# Altium PCB PCB_modulos_placa_swarm_robotics.PcbDoc
Units mil, origin at the board's own origin, x right, y up, seen from the top; angles counter-clockwise.
Board outline 2600 x 2100 mil, 2 copper layers (Top Layer, Bottom Layer); 9 components, 28 nets, 79 pads, 0 vias.
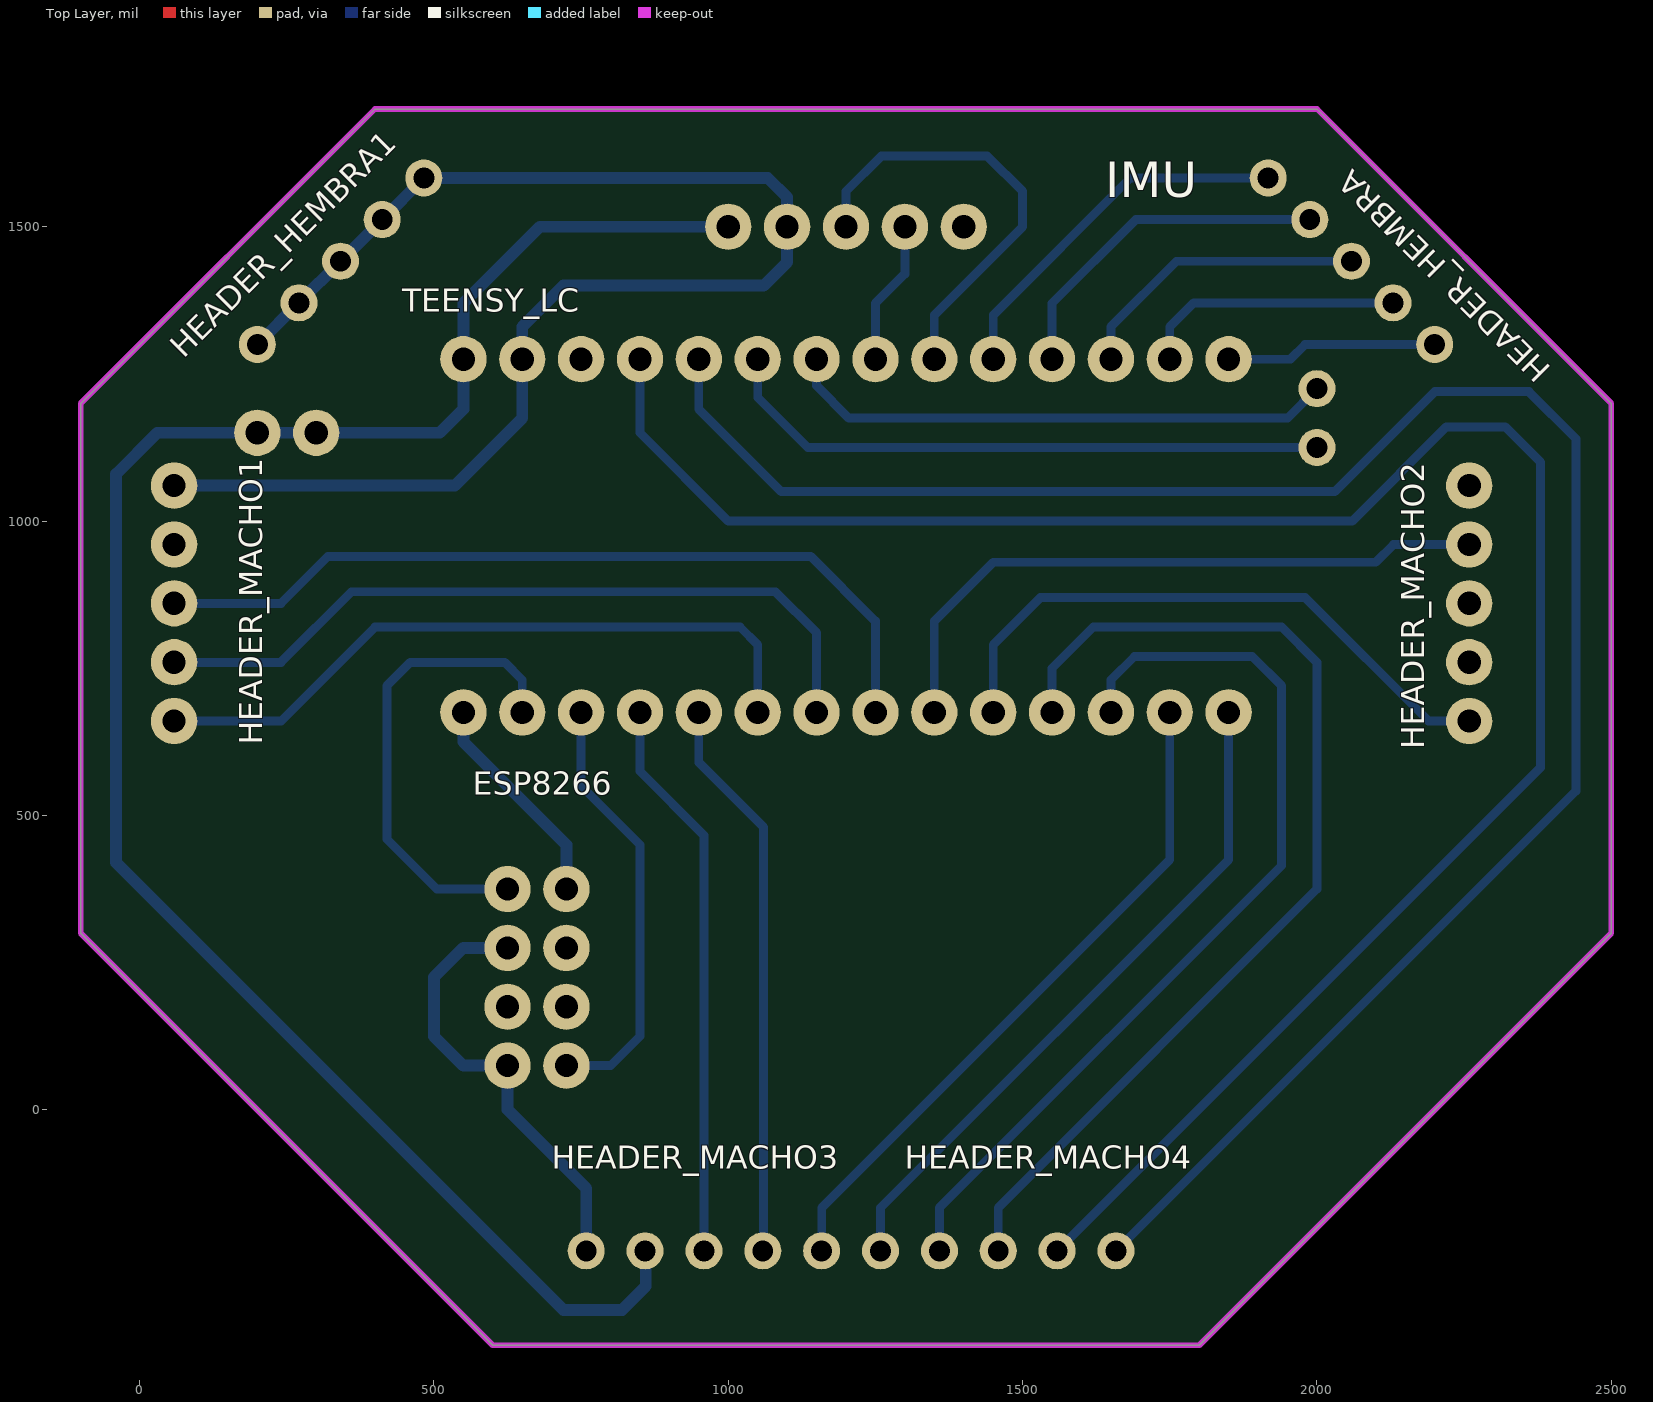
[diagram p0: Top Layer view]
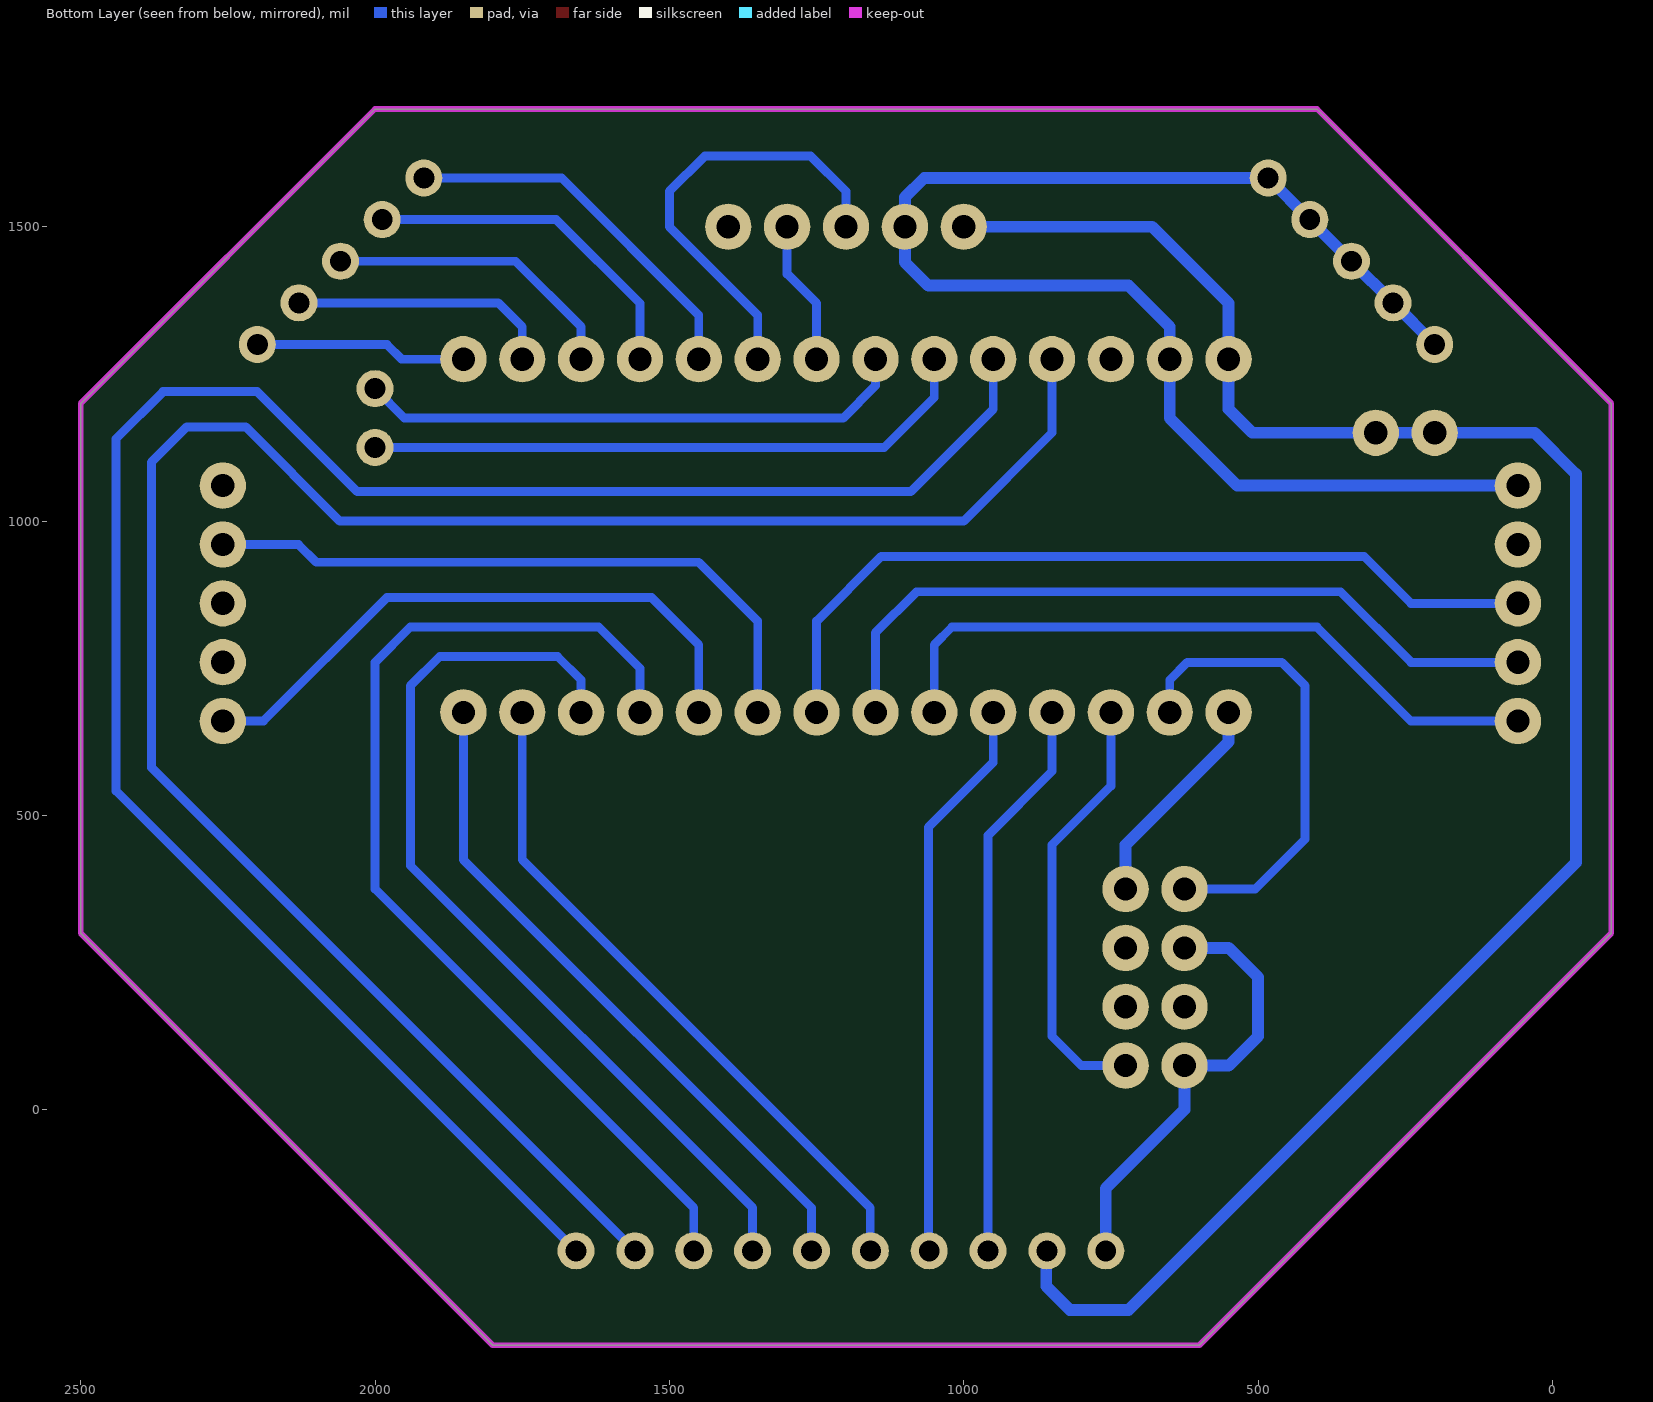
[diagram p1: Bottom Layer view, seen from below]

## Layer stack, top to bottom
Top Solder: solder mask 0.4, Solder Resist, Dk 3.5
Top Layer: signal copper 1.4
Dielectric 1: dielectric 12.6, FR-4, Dk 4.8
Bottom Layer: signal copper 1.4
Bottom Solder: solder mask 0.4, Solder Resist, Dk 3.5

## Board outline
-100,300 -100,1200 400,1700 2000,1700 2500,1200 2500,300 1800,-400 600,-400

## Design rules (kind name [scope] priority, off if disabled: settings)
Clearance [All] p1: gap=10
ComponentClearance [All] p1: gap=0 collisioncheckmode=3 verticalgap=10 showdistances=FALSE
PolygonConnect [All] p1: connectstyle=Relief reliefconductorwidth=10 reliefentries=4 polygonreliefangle="90 Angle" airgapwidth=10
RoutingVias [All] p1: holewidth=28 width=50 viastyle="Through Hole" minholewidth=28 minwidth=50 maxholewidth=28 maxwidth=50
SolderMaskExpansion [All] p1: expansion=4
Width [All] p1: maxlimit=25 minlimit=10 preferedwidth=15
28 further rules are at their usual default settings.

## Components (designator, comment, footprint, x,y, rotation, side; value= is the part's Value field where it differs from the comment)
ESP8266 "ESP8266" ESP8266 625,75 r180 top
HEADER_HEMBRA "HEADER_HEMBRAx5_100MIL" HDRx5HEMBRA_FOOTPRINT 2200,1300 r135 top
HEADER_HEMBRA1 "HEADER_HEMBRAx5_100MIL" HDRx5HEMBRA_FOOTPRINT 200,1300 r45 top
HEADER_MACHO1 "HEADERx5_MACHO_100MIL" HEADERx5_MACHO_FOOTPRINT#1 58.66,660.32 r90 top
HEADER_MACHO2 "HEADERx5_MACHO_100MIL" HEADERx5_MACHO_FOOTPRINT#1 2258.66,660.32 r90 top
HEADER_MACHO3 "HEADERx5_MACHO_100MIL" HEADERx5_MACHO_FOOTPRINT#2 758.66,-239.68 r0 top
HEADER_MACHO4 "HEADERx5_MACHO_100MIL" HEADERx5_MACHO_FOOTPRINT#2 1258.66,-239.68 r0 top
IMU "MPU6050" IMU_ 1000,1500 r0 top
TEENSY_LC "TEENSY_LC" TEENSY_LC 550,675 r0 top

## Footprints (in the part's own frame and the unit in brackets; to place one, negate y for a bottom-side part, rotate by r counter-clockwise, add the part's x,y. Pads: shape width x height; smd on the part's side, far side on the other; paste and mask are expansions set on the pad)
ESP8266 [mm]
  round 2 hole 1: 0(0,0) 1(0,-2.54) 2(0,-5.08) 3(0,-7.62) 4(-2.54,-7.62) 5(-2.54,-5.08) 6(-2.54,-2.54) 7(-2.54,0)
  body extent -23.19,-11.07 1.61,3.43, height 14.38
HDRx5HEMBRA_FOOTPRINT [mm]
  round 1.6 hole 0.9: 0(0,0) 1(2.54,0) 2(5.08,0) 3(7.62,0) 4(10.16,0)
  body extent -1.67,-1.27 11.83,1.27, height 8.5
HEADERx5_MACHO_FOOTPRINT#1 [mm]
  round 2 hole 1: 0(0,0) 1(2.54,0) 2(5.08,0) 3(7.62,0) 4(10.16,0)
  body extent -1.27,-1.27 11.43,1.27, height 3
HEADERx5_MACHO_FOOTPRINT#2 [mm]
  round 1.6 hole 0.9: 0(0,0) 1(2.54,0) 2(5.08,0) 3(7.62,0) 4(10.16,0)
  body extent -1.27,-1.27 11.43,1.27, height 3
IMU_ [mm]
  round 2 hole 1: 0(0,0) 1(2.54,0) 2(5.08,0) 3(7.62,0) 4(10.16,0)
  body extent -1.67,-1.27 11.83,1.27, height 8.5
TEENSY_LC [mm]
  round 2 hole 1: 0(0,0) 1(2.54,0) 2(5.08,0) 3(7.62,0) 4(10.16,0) 5(12.7,0) 6(15.24,0) 7(17.78,0) 8(20.32,0) 9(22.86,0) 10(25.4,0) 11(27.94,0) 12(30.48,0) 13(33.02,0) 19(33.02,15.24) 20(30.48,15.24) 21(27.94,15.24) 22(25.4,15.24) 23(22.86,15.24) 24(20.32,15.24) 25(17.78,15.24) 26(15.24,15.24) 27(12.7,15.24) 28(10.16,15.24) 29(7.62,15.24) 30(5.08,15.24) 31(2.54,15.24) 32(0,15.24)
  body extent -2.74,-1.42 34.69,16.51, height 15.49

## Free pads (board coordinates)
  round 60 hole 145.67: 0(0,0) 0(0,1712.6) 0(2352.6,0) 0(2352.6,1712.6)
  round 78.74 hole 39.37: 0(200,1150) 1(300,1150)
  round 62.99 hole 35.43: 2(2000,1125) 2(2000,1225)

## Nets (pads, with @x,y where several pads share a name; then routed paths per layer and width w, separated by ;. In a path a pad name is that pad's centre, name@x,y a point inside that pad or via, vN(x,y) a via of type N, cw(c..) or ccw(c..) an arc to the next point about the centre after c; other vN are vias at no path point)
3.3V: ESP8266.0 ESP8266.2 HEADER_MACHO3.0 | length 761.5
  Bottom Layer w20: ESP8266.2 550,275 500,225 500,125 550,75 ESP8266.0 625,0 758.66,-133.66 HEADER_MACHO3.0
5V: HEADER_MACHO3.1 IMU.0 pad.0@200,1150 pad.1 TEENSY_LC.32 | length 3279.9
  Bottom Layer w20: HEADER_MACHO3.1 860,-241.02 860,-300 820,-340 720,-340 -40,420 -40,1080 30,1150 510,1150 550,1190 TEENSY_LC.32 550,1370 680,1500 980,1500 IMU.0@1000,1480
AIN1: HEADER_MACHO4.2 TEENSY_LC.10 | length 1802.8
  Bottom Layer w15: HEADER_MACHO4.2 1458.66,-166.34 2000,375 2000,760 1940,820 1620,820 1550,750 TEENSY_LC.10
AIN2: HEADER_MACHO4.1 TEENSY_LC.11 | length 1582.8
  Bottom Layer w15: HEADER_MACHO4.1 1358.66,-166.34 1940,415 1940,720 1890,770 1690,770 1650,730 TEENSY_LC.11
BIN1: HEADER_MACHO4.4 TEENSY_LC.28 | length 3439.9
  Bottom Layer w15: TEENSY_LC.28 950,1190 1090,1050 2030,1050 2200,1220 2360,1220 2440,1140 2440,541.65 HEADER_MACHO4.4
BIN2: HEADER_MACHO4.3 TEENSY_LC.29 | length 3488.2
  Bottom Layer w15: TEENSY_LC.29 850,1150 1000,1000 2060,1000 2220,1160 2320,1160 2380,1100 2380,581.65 HEADER_MACHO4.3
ECHO_3V: HEADER_MACHO2.3 TEENSY_LC.8 | length 1117.6
  Bottom Layer w15: TEENSY_LC.8 1350,830 1450,930 2100,930 2130.32,960.32 HEADER_MACHO2.3
ENCODER1: HEADER_MACHO3.2 TEENSY_LC.3 | length 959.7
  Bottom Layer w15: TEENSY_LC.3 850,575 958.66,466.34 HEADER_MACHO3.2
ENCODER2: HEADER_MACHO3.3 TEENSY_LC.4 | length 960.8
  Bottom Layer w15: TEENSY_LC.4 950,590 1060,480 1060,-238.35 HEADER_MACHO3.3
ENCODER3: HEADER_MACHO3.4 TEENSY_LC.12 | length 1159.6
  Bottom Layer w15: HEADER_MACHO3.4 1158.66,-166.34 1750,425 TEENSY_LC.12
ENCODER4: HEADER_MACHO4.0 TEENSY_LC.13 | length 1159.6
  Bottom Layer w15: HEADER_MACHO4.0 1258.66,-166.34 1850,425 TEENSY_LC.13
GND: HEADER_HEMBRA1.0 HEADER_HEMBRA1.1 HEADER_HEMBRA1.2 HEADER_HEMBRA1.3 HEADER_HEMBRA1.4 HEADER_MACHO1.4 IMU.1 TEENSY_LC.31 | length 2430.2
  Bottom Layer w20: HEADER_MACHO1.4 535.32,1060.32 650,1175 TEENSY_LC.31 650,1330 720,1400 1060,1400 1100,1440 IMU.1 1100,1550 1067.16,1582.84 HEADER_HEMBRA1.4 HEADER_HEMBRA1.3 HEADER_HEMBRA1.2 HEADER_HEMBRA1.1 HEADER_HEMBRA1.0
GND_1: ESP8266.4 TEENSY_LC.0 | length 372.5
  Bottom Layer w20: TEENSY_LC.0 550,625 725,450 ESP8266.4
NET_PIN8: HEADER_MACHO2.0 TEENSY_LC.9 | length 1043.7
  Bottom Layer w15: TEENSY_LC.9 1450,790 1530,870 1980,870 2189.68,660.32 HEADER_MACHO2.0
NET_PIN20: pad.2@2000,1225 TEENSY_LC.26 | length 938.5
  Bottom Layer w15: TEENSY_LC.26 1150,1230 1205,1175 1950,1175 pad.2@2000,1225
NET_PIN21: pad.2@2000,1125 TEENSY_LC.27 | length 1050.2
  Bottom Layer w15: TEENSY_LC.27 1050,1210 1135,1125 pad.2@2000,1125
NetHEADER_HEMBRA_0: HEADER_HEMBRA.0 TEENSY_LC.19 | length 360.4
  Bottom Layer w15: TEENSY_LC.19 1955,1275 1980,1300 HEADER_HEMBRA.0
NetHEADER_HEMBRA_1: HEADER_HEMBRA.1 TEENSY_LC.20 | length 451.2
  Bottom Layer w15: TEENSY_LC.20 1750,1330 1790.71,1370.71 HEADER_HEMBRA.1
NetHEADER_HEMBRA_2: HEADER_HEMBRA.2 TEENSY_LC.21 | length 509.7
  Bottom Layer w15: TEENSY_LC.21 1650,1330 1761.42,1441.42 HEADER_HEMBRA.2
NetHEADER_HEMBRA_3: HEADER_HEMBRA.3 TEENSY_LC.22 | length 591.7
  Bottom Layer w15: TEENSY_LC.22 1550,1370 1692.13,1512.13 HEADER_HEMBRA.3
NetHEADER_HEMBRA_4: HEADER_HEMBRA.4 TEENSY_LC.23 | length 638.6
  Bottom Layer w15: TEENSY_LC.23 1450,1350 1682.84,1582.84 HEADER_HEMBRA.4
RX_TEENSY_TX_WIFI: ESP8266.3 TEENSY_LC.1 | length 814.2
  Bottom Layer w15: ESP8266.3 505,375 420,460 420,720 460,760 620,760 650,730 TEENSY_LC.1
SCL: IMU.3 TEENSY_LC.25 | length 240.7
  Bottom Layer w15: TEENSY_LC.25@1250,1280 1250,1370 1300,1420 IMU.3
SDA: IMU.2 TEENSY_LC.24 | length 756.8
  Bottom Layer w15: IMU.2 1200,1560 1260,1620 1440,1620 1500,1560 1500,1500 1350,1350 TEENSY_LC.24
TRIG_B0: HEADER_MACHO1.2 TEENSY_LC.7 | length 1423.7
  Bottom Layer w15: HEADER_MACHO1.2@60,860 240,860 320,940 1140,940 1250,830 TEENSY_LC.7
TRIG_B1: HEADER_MACHO1.1 TEENSY_LC.6 | length 1305
  Bottom Layer w15: HEADER_MACHO1.1@58.66,760 240,760 360,880 1080,880 1150,810 TEENSY_LC.6
TRIG_B2: HEADER_MACHO1.0 TEENSY_LC.5 | length 1184.9
  Bottom Layer w15: HEADER_MACHO1.0 240.32,660.32 400,820 1020,820 1050,790 TEENSY_LC.5
TX_TEENSY_RX_WIFI: ESP8266.7 TEENSY_LC.2 | length 737.1
  Bottom Layer w15: ESP8266.7 800,75 850,125 850,450 750,550 TEENSY_LC.2
pads on no net: ESP8266.1 ESP8266.5 ESP8266.6 HEADER_MACHO1.3 HEADER_MACHO2.1 HEADER_MACHO2.2 HEADER_MACHO2.4 IMU.4 TEENSY_LC.30

## Keep-outs
Keep-Out Layer:
  the board outline again, w10